# EAGLE board sbc (EAGLE 7.5.0)
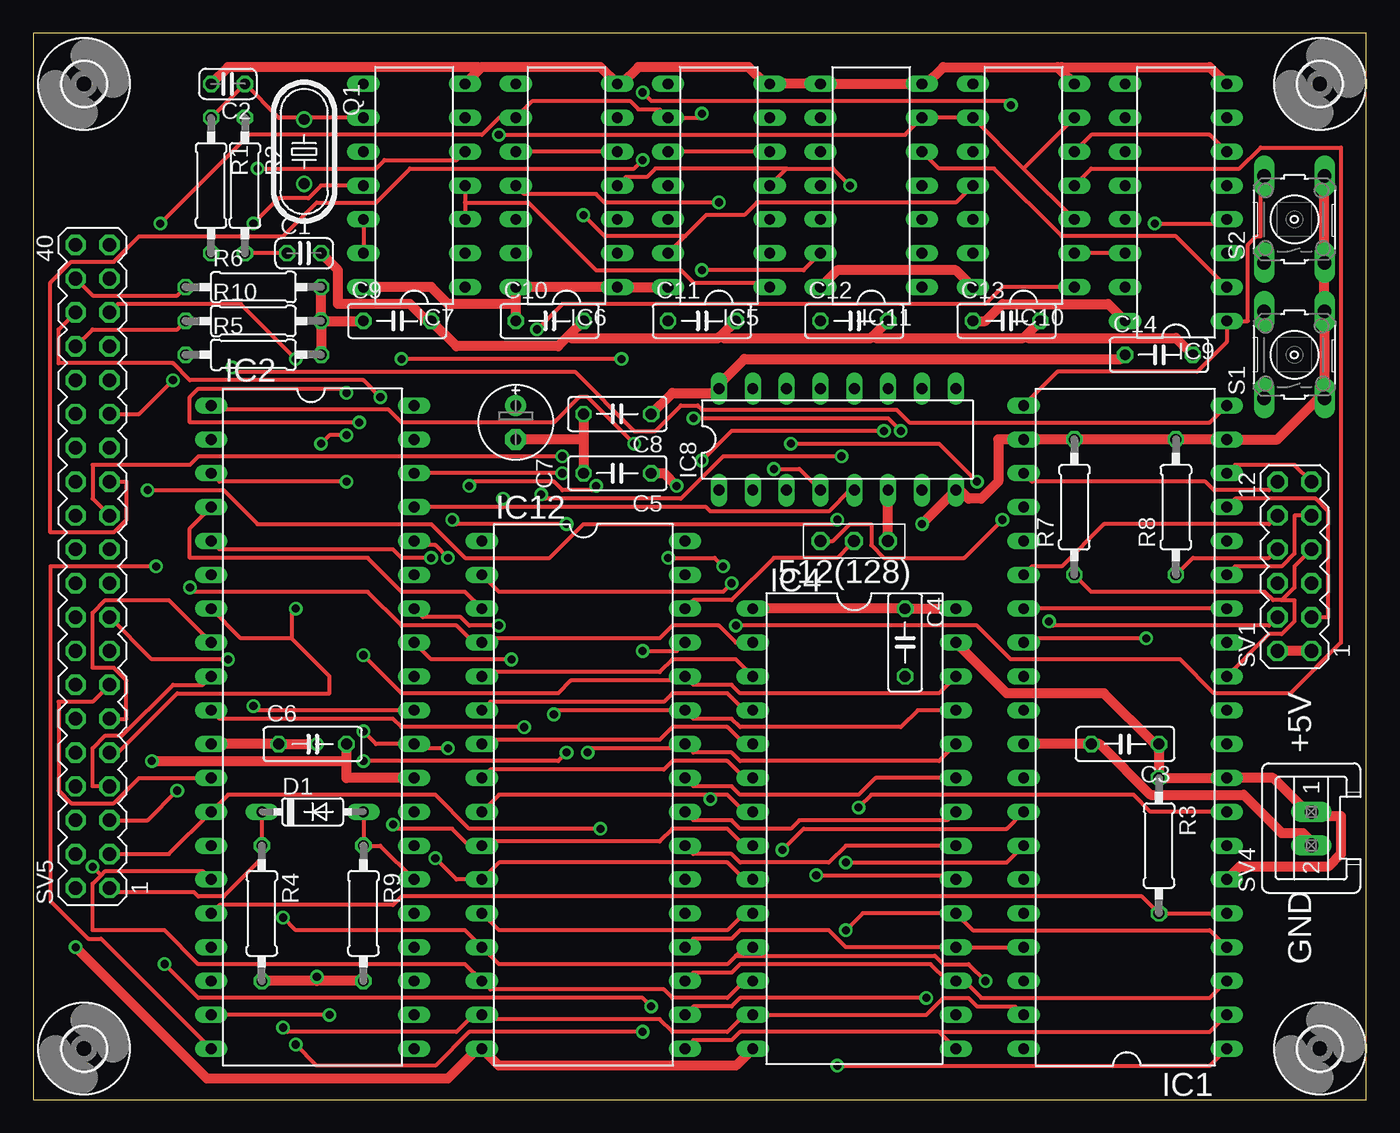
[diagram p0: board, top side]
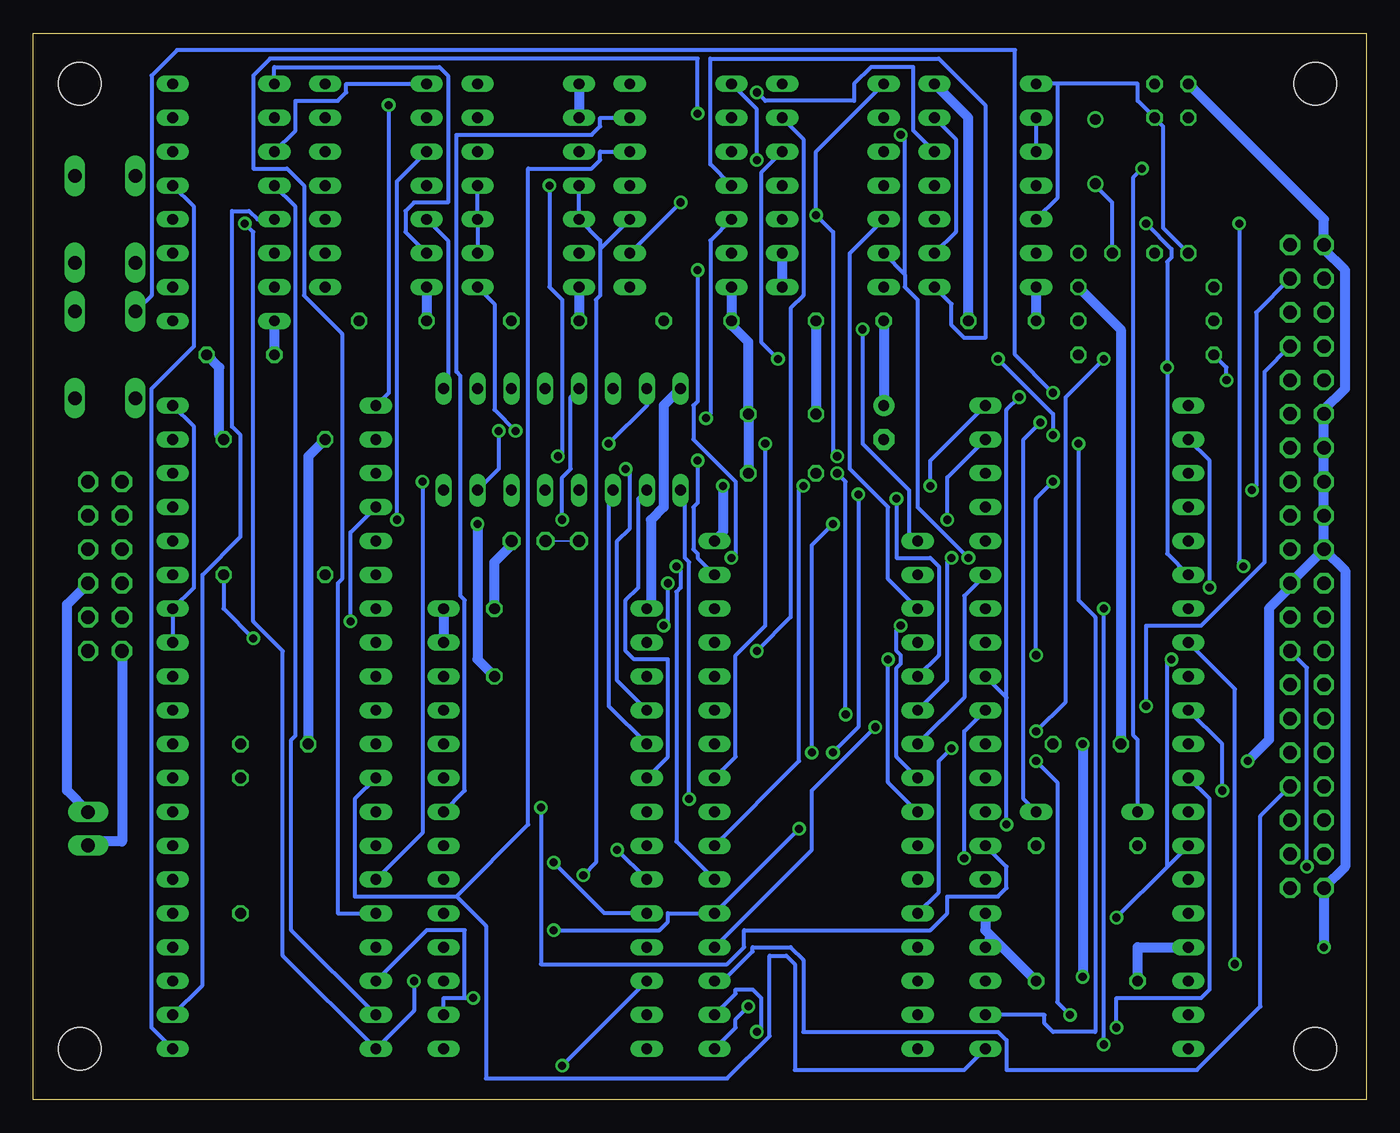
[diagram p1: board, bottom side, seen from below]

Size 100 x 80 mm. Coordinates in mm from the lower left corner, seen from the top.
Outline: 0,0 100,0 100,80 0,80 0,0
Copper layers (1*16): Top 0.035mm / dielectric 1.5mm / Bottom 0.035mm
Design rules "default *": minimum track width 10mil, minimum drill 24mil, track to track 8mil, track to pad 8mil, pad to pad 8mil, via to via 8mil, smd to smd 8mil, copper to edge 40mil, drill to drill 8mil, minimum pad ring 8mil, minimum via ring 8mil, stop-mask expansion 4mil, vias tented up to drill 0mil, thermal gap 10mil
Net classes: 0 default: width 0.305 mm; 1 power: width 0.762 mm

## Footprints (pad centres in the part's own frame; a part is rotated, then mirrored left to right if it is on the bottom)
C025-024X044 = drill 0.813 octagon: 1 -1.27,0; 2 1.27,0
C050-025X075 = drill 0.813 octagon: 1 -2.54,0; 2 2.54,0
E2,5-6E = drill 0.813 pad 1.575: + -1.27,0 | drill 0.813 pad 1.575 octagon: - 1.27,0
DO35-7 = drill 0.813 long: A 3.81,0; C -3.81,0
3,2 = hole 3.2: 0,0
DIL40 = drill 0.813 long: 1 -24.13,-7.62; 2 -21.59,-7.62; 3 -19.05,-7.62; 4 -16.51,-7.62; 5 -13.97,-7.62; 6 -11.43,-7.62; 7 -8.89,-7.62; 8 -6.35,-7.62; 9 -3.81,-7.62; 10 -1.27,-7.62; 11 1.27,-7.62; 12 3.81,-7.62; 13 6.35,-7.62; 14 8.89,-7.62; 15 11.43,-7.62; 16 13.97,-7.62; 17 16.51,-7.62; 18 19.05,-7.62; 19 21.59,-7.62; 20 24.13,-7.62; 21 24.13,7.62; 22 21.59,7.62; 23 19.05,7.62; 24 16.51,7.62; 25 13.97,7.62; 26 11.43,7.62; 27 8.89,7.62; 28 6.35,7.62; 29 3.81,7.62; 30 1.27,7.62; 31 -1.27,7.62; 32 -3.81,7.62; 33 -6.35,7.62; 34 -8.89,7.62; 35 -11.43,7.62; 36 -13.97,7.62; 37 -16.51,7.62; 38 -19.05,7.62; 39 -21.59,7.62; 40 -24.13,7.62
DIL28-6 = drill 0.813 long: 1 -16.51,-7.62; 2 -13.97,-7.62; 3 -11.43,-7.62; 4 -8.89,-7.62; 5 -6.35,-7.62; 6 -3.81,-7.62; 7 -1.27,-7.62; 8 1.27,-7.62; 9 3.81,-7.62; 10 6.35,-7.62; 11 8.89,-7.62; 12 11.43,-7.62; 13 13.97,-7.62; 14 16.51,-7.62; 15 16.51,7.62; 16 13.97,7.62; 17 11.43,7.62; 18 8.89,7.62; 19 6.35,7.62; 20 3.81,7.62; 21 1.27,7.62; 22 -1.27,7.62; 23 -3.81,7.62; 24 -6.35,7.62; 25 -8.89,7.62; 26 -11.43,7.62; 27 -13.97,7.62; 28 -16.51,7.62
DIL14 = drill 0.813 long: 1 -7.62,-3.81; 2 -5.08,-3.81; 3 -2.54,-3.81; 4 0,-3.81; 5 2.54,-3.81; 6 5.08,-3.81; 7 7.62,-3.81; 8 7.62,3.81; 9 5.08,3.81; 10 2.54,3.81; 11 0,3.81; 12 -2.54,3.81; 13 -5.08,3.81; 14 -7.62,3.81
DIL16 = drill 0.813 long: 1 -8.89,-3.81; 2 -6.35,-3.81; 3 -3.81,-3.81; 4 -1.27,-3.81; 5 1.27,-3.81; 6 3.81,-3.81; 7 6.35,-3.81; 8 8.89,-3.81; 9 8.89,3.81; 10 6.35,3.81; 11 3.81,3.81; 12 1.27,3.81; 13 -1.27,3.81; 14 -3.81,3.81; 15 -6.35,3.81; 16 -8.89,3.81
DIL32 = drill 0.813 long: 1 -17.78,-7.62; 2 -15.24,-7.62; 3 -12.7,-7.62; 4 -10.16,-7.62; 5 -7.62,-7.62; 6 -5.08,-7.62; 7 -2.54,-7.62; 8 0,-7.62; 9 2.54,-7.62; 10 5.08,-7.62; 11 7.62,-7.62; 12 10.16,-7.62; 13 12.7,-7.62; 14 15.24,-7.62; 15 17.78,-7.62; 16 20.32,-7.62; 17 20.32,7.62; 18 17.78,7.62; 19 15.24,7.62; 20 12.7,7.62; 21 10.16,7.62; 22 7.62,7.62; 23 5.08,7.62; 24 2.54,7.62; 25 0,7.62; 26 -2.54,7.62; 27 -5.08,7.62; 28 -7.62,7.62; 29 -10.16,7.62; 30 -12.7,7.62; 31 -15.24,7.62; 32 -17.78,7.62
HC49U-V = drill 0.813: 1 -2.413,0; 2 2.413,0
0207/10 = drill 0.813 octagon: 1 -5.08,0; 2 5.08,0
B3F-10XX = drill 1.016 long: 1 -3.251,2.261; 2 3.251,2.261; 3 -3.251,-2.261; 4 3.251,-2.261
MA06-2 = drill 1.016 octagon: 1 -6.35,-1.27; 2 -6.35,1.27; 3 -3.81,-1.27; 4 -3.81,1.27; 5 -1.27,-1.27; 6 -1.27,1.27; 7 1.27,-1.27; 8 1.27,1.27; 9 3.81,-1.27; 10 3.81,1.27; 11 6.35,-1.27; 12 6.35,1.27
S02P = drill 1.016 long: 1 1.25,0; 2 -1.25,0
MA20-2 = drill 1.016 octagon: 1 -24.13,-1.27; 2 -24.13,1.27; 3 -21.59,-1.27; 4 -21.59,1.27; 5 -19.05,-1.27; 6 -19.05,1.27; 7 -16.51,-1.27; 8 -16.51,1.27; 9 -13.97,-1.27; 10 -13.97,1.27; 11 -11.43,-1.27; 12 -11.43,1.27; 13 -8.89,-1.27; 14 -8.89,1.27; 15 -6.35,-1.27; 16 -6.35,1.27; 17 -3.81,-1.27; 18 -3.81,1.27; 19 -1.27,-1.27; 20 -1.27,1.27; 21 1.27,-1.27; 22 1.27,1.27; 23 3.81,-1.27; 24 3.81,1.27; 25 6.35,-1.27; 26 6.35,1.27; 27 8.89,-1.27; 28 8.89,1.27; 29 11.43,-1.27; 30 11.43,1.27; 31 13.97,-1.27; 32 13.97,1.27; 33 16.51,-1.27; 34 16.51,1.27; 35 19.05,-1.27; 36 19.05,1.27; 37 21.59,-1.27; 38 21.59,1.27; 39 24.13,-1.27; 40 24.13,1.27
JUMP2 = drill 0.9 octagon: 1 0,2.54; 2 0,0; 3 0,-2.54

## Placement (x,y rotation side)
C1  22p  [C025-024X044]  20.32,63.5 0 top
C2  22p  [C025-024X044]  14.61,76.2 180 top
C3  100n  [C050-025X075]  81.92,26.67 180 top
C4  100n  [C050-025X075]  65.41,34.29 270 top
C5  100n  [C050-025X075]  43.81,46.99 180 top
C6  100n  [C050-025X075]  20.95,26.67 0 top
C7  .47m  [E2,5-6E]  36.2,50.8 270 top
C8  100n  [C050-025X075]  43.81,51.44 180 top
C9  100n  [C050-025X075]  27.3,58.42 0 top
C10  100n  [C050-025X075]  38.73,58.42 0 top
C11  100n  [C050-025X075]  50.16,58.42 0 top
C12  100n  [C050-025X075]  61.59,58.42 0 top
C13  100n  [C050-025X075]  73.03,58.42 0 top
C14  100n  [C050-025X075]  84.45,55.88 0 top
D1  1N4148  [DO35-7]  20.95,21.59 0 top
H1  3.2  [3,2]  3.81,76.2 0 top
H2  3.2  [3,2]  96.52,76.2 0 top
H3  3.2  [3,2]  3.81,3.81 0 top
H4  3.2  [3,2]  96.52,3.81 0 top
IC1  Z84C4010 SIO/0  [DIL40]  81.92,27.94 90 top
IC2  Z84C0006  [DIL40]  20.95,27.94 270 top
IC4  27C128  [DIL28-6]  61.59,20.32 270 top
IC5  74HCT32  [DIL14]  51.44,68.58 90 top
IC6  74HCT32  [DIL14]  40.01,68.58 90 top
IC7  74HCT00  [DIL14]  28.57,68.58 90 top
IC8  74HCT138  [DIL16]  60.33,49.53 0 top
IC9  74HCT175  [DIL16]  85.72,67.31 90 top
IC10  74HCT02  [DIL14]  74.3,68.58 90 top
IC11  74HCT02  [DIL14]  62.87,68.58 90 top
IC12  AS6C4008 (1008)  [DIL32]  41.27,24.13 270 top
Q1  7.3728 MHz  [HC49U-V]  20.32,71.12 270 top
R1  1M  [0207/10]  13.34,68.58 270 top
R2  1k  [0207/10]  15.88,68.58 270 top
R3  4k7  [0207/10]  84.45,19.05 270 top
R4  4k7  [0207/10]  17.14,13.97 270 top
R5  4k7  [0207/10]  16.51,55.88 0 top
R6  4k7  [0207/10]  16.51,60.96 0 top
R7  10k  [0207/10]  78.11,44.45 90 top
R8  10k  [0207/10]  85.72,44.45 90 top
R9  4k7  [0207/10]  24.77,13.97 270 top
R10  4k7  [0207/10]  16.51,58.42 0 top
S1  WARM  [B3F-10XX]  94.61,55.88 90 top
S2  COLD  [B3F-10XX]  94.61,66.04 90 top
SV1  TTY A/B  [MA06-2]  94.61,40.01 90 top
SV4  IDE Power  [S02P]  95.89,20.32 90 top
SV5  IDE-CF  [MA20-2]  4.45,40.01 90 top
U$1  JMP2  [JUMP2]  61.58,41.91 90 top

## Library data of the parts
C1-C14 R1-R10 = resistor
D1 = diode
H1-H4 = holes
IC1 IC2 = zilog
IC4 = memory-hitachi; OC_FARNELL: unknown; OC_NEWARK: unknown
IC5-IC11 = 74xx-us
IC12 = hitachi_sram_hm628512a-series_rev1
Q1 = crystal; OC_FARNELL: 1666969; OC_NEWARK: unknown
S1 S2 = switch-omron; MPN: B3F-1000; OC_FARNELL: 176432; OC_NEWARK: 36M3542
SV1 SV5 = con-lstb; OC_FARNELL: unknown; OC_NEWARK: unknown
SV4 = con-amp-mt; OC_FARNELL: unknown; OC_NEWARK: unknown
U$1 = jmp1-2

## Nets
A0: IC1.34 IC2.30 IC4.10 IC12.12 SV5.35
A1: IC1.33 IC2.31 IC4.9 IC12.11 SV5.33
A2: IC2.32 IC4.8 IC12.10 SV5.36
A3: IC2.33 IC4.7 IC8.1 IC12.9
A4: IC2.34 IC4.6 IC8.2 IC12.8
A5: IC2.35 IC4.5 IC8.3 IC12.7
A6: IC2.36 IC4.4 IC8.4 IC12.6
A7: IC2.37 IC4.3 IC8.5 IC12.5
A8: IC2.38 IC4.25 IC12.27
A9: IC2.39 IC4.24 IC12.26
A10: IC2.40 IC4.21 IC12.23
A11: IC2.1 IC4.23 IC12.25
A12: IC2.2 IC4.2 IC12.4
A13: IC2.3 IC4.26 IC12.28
A14: IC2.4 IC6.12 IC12.3
A15: IC2.5 IC6.13 IC10.3 IC10.6 IC10.9 IC11.6
CLK: IC1.13 IC1.14 IC1.20 IC1.27 IC2.6 IC7.11
CTA: IC1.18 SV1.11
CTB: IC1.23 SV1.12
D0: IC1.40 IC2.14 IC4.11 IC9.4 IC12.13 SV5.17
D1: IC1.1 IC2.15 IC4.12 IC9.5 IC12.14 SV5.15
D2: IC1.39 IC2.12 IC4.13 IC9.12 IC12.15 SV5.13
D3: IC1.2 IC2.8 IC4.15 IC9.13 IC12.17 SV5.11
D4: IC1.38 IC2.7 IC4.16 IC12.18 SV5.9
D5: IC1.3 IC2.9 IC4.17 IC12.19 SV5.7
D6: IC1.37 IC2.10 IC4.18 IC12.20 SV5.5
D7: IC1.4 IC2.13 IC4.19 IC12.21 SV5.3
GND [power]: C1.2 C2.2 C3.2 C4.2 C5.2 C6.2 C7.- C8.2 C9.2 C10.2 C11.2 C12.2 C13.2 C14.2 IC1.19 IC1.22 IC1.31 IC2.29 IC4.14 IC5.7 IC6.7 IC7.7 IC8.8 IC9.8 IC10.7 IC11.7 IC11.8 IC11.9 IC12.16 R7.2 R8.2 S1.3 S1.4 S2.3 S2.4 SV1.1 SV1.2 SV4.2 SV5.2 SV5.19 SV5.22 SV5.24 SV5.26 SV5.28 SV5.30 SV5.40
INT: IC1.5 IC2.16 R3.2
IORD: IC5.8 SV5.25
IOREQ: IC1.36 IC2.20 IC5.9 IC6.9
IOWR: IC5.13 IC6.8 IC10.11 SV5.23
M1: IC1.8 IC2.27
M15: IC11.1 IC12.31
M16: IC10.4 IC12.2
M17: IC10.10 U$1.1
M18: IC10.1 IC12.1
MEMRD: IC4.22 IC5.6 IC12.24
MEMWR: IC6.6 IC12.29
MREQ: IC2.19 IC5.4 IC6.4
N$1: IC9.6 IC10.5
N$2: IC9.2 IC11.5
N$3: IC7.2 IC7.6
N$4: IC5.11 IC7.1
N$5: C2.1 IC7.9 IC7.10 Q1.1 R1.1
N$6: C1.1 Q1.2 R2.2
N$7: IC5.2 IC6.11
N$8: IC5.1 IC7.3 IC7.4
N$9: IC7.8 IC7.12 IC7.13 R1.2 R2.1
N$10: IC9.11 IC10.8
N$11: IC9.14 IC10.2
N$13: IC11.2 IC11.3 IC11.4
N$16: IC12.30 U$1.2
N$18: IC9.9 IC10.13
N$28: R6.1 SV5.38
N$29: R10.1 SV5.34
N$30: R5.1 SV5.29
RAMS: IC11.13 IC12.22
RD: IC1.32 IC2.21 IC5.5 IC5.10
RESET: D1.C IC1.21 IC7.5 IC9.1 R4.1 S2.2 SV5.1
ROMS: IC4.20 IC5.3 IC11.11 IC11.12
RTA: IC1.17 SV1.3
RTB: IC1.24 SV1.4
RXA: IC1.12 R7.1 SV1.7
RXB: IC1.28 R8.1 SV1.8
TXA: IC1.15 SV1.9
TXB: IC1.26 SV1.10
VCC [power]: C3.1 C4.1 C5.1 C6.1 C7.+ C8.1 C9.1 C10.1 C11.1 C12.1 C13.1 C14.1 IC1.6 IC1.9 IC2.11 IC2.17 IC2.24 IC2.25 IC4.1 IC4.27 IC4.28 IC5.14 IC6.1 IC6.2 IC6.14 IC7.14 IC8.6 IC8.16 IC9.16 IC10.14 IC11.14 IC12.32 R3.1 R4.2 R5.2 R6.2 R9.2 R10.2 SV1.5 SV4.1 U$1.3
WR: IC2.22 IC6.5 IC6.10
WRESET: D1.A IC2.26 R9.1 S1.2
Y0: IC1.35 IC8.15
Y2: IC8.13 SV5.37
Y6: IC8.9 IC10.12
Y7: IC5.12 IC8.7

## Tracks (layer width: path | path; a pad name or v marks a point on that pad's centre or on a via)
A0  (via drill 0.61)
  Top 0.305: IC12.12 34.92,12.7 52.07,12.7 53.34,13.97 IC4.10 | v31.11,26.35 28.89,26.35 IC2.30 25.72,26.67 v24.77,27.62 | IC1.34 73.03,17.78 v60.96,17.78 | SV5.35 6.35,59.69 15.56,59.69 v19.68,55.56
  Bottom 0.305: v31.11,26.35 32.07,25.4 32.07,15.56 IC12.12 | v60.96,17.78 57.15,13.97 IC4.10 | v19.68,55.56 22.54,52.7 22.54,29.84 v24.77,27.62
A1  (via drill 0.61)
  Top 0.305: IC4.9 53.34,16.51 52.07,17.78 34.92,17.78 IC12.11 31.75,16.51 v30.16,18.1 | IC1.33 73.03,20.32 57.78,20.32 v56.2,18.73 | v16.51,29.53 16.83,29.21 IC2.31
  Bottom 0.305: IC2.31 30.16,27.62 v30.16,18.1 | IC4.9 v56.2,18.73 | SV5.33 7.62,54.61 7.62,40.32 12.38,35.56 16.51,35.56 v16.51,29.53
A2  (via drill 0.61)
  Top 0.305: IC4.8 53.34,19.05 52.07,20.32 47.94,20.32 46.99,19.37 33.97,19.37 IC12.10 32.7,19.05 31.43,20.32 27.3,20.32 v26.99,20.64 | SV5.36 1.91,57.78 1.91,55.24 10.48,55.24 11.75,53.98 24.77,53.98 v26.04,52.7
  Bottom 0.305: 26.99,30.16 IC2.32 | v26.99,20.64 26.99,30.16 | v26.04,52.7 26.99,51.75 26.99,30.16
A3  (via drill 0.61)
  Top 0.305: IC12.9 34.92,22.86 50.8,22.86 | 50.8,22.86 52.07,22.86 53.34,21.59 IC4.7 | IC2.33 29.84,33.02 v35.88,33.02 | 50.8,22.86 v50.8,22.54
  Bottom 0.305: v35.88,33.02 35.88,23.81 IC12.9 | IC8.1 51.12,45.4 51.12,40.64 50.8,40.32 v50.8,22.54
A4  (via drill 0.61)
  Top 0.305: IC12.8 34.29,24.77 47.31,24.77 47.94,25.4 52.07,25.4 53.34,24.13 IC4.6 | IC2.34 29.21,36.2 32.07,36.2 32.7,35.56 v34.92,35.56
  Bottom 0.305: v34.92,35.56 35.24,35.24 35.24,33.66 34.92,33.34 34.92,32.7 35.24,32.38 35.24,25.72 IC12.8 | IC8.2 54.61,45.09 54.61,38.42 55.56,37.47 55.56,33.66 54.93,33.02 52.39,33.02 52.39,25.72 IC4.6
A5
  Top 0.305: IC12.7 33.97,26.99 46.99,26.99 47.94,27.94 52.07,27.94 53.34,26.67 IC4.5
  Bottom 0.305: IC12.7 30.16,30.16 30.16,37.78 IC2.35 | IC4.5 56.83,29.53 56.83,45.4 IC8.3
A6  (via drill 0.61)
  Top 0.305: IC12.6 34.29,29.84 47.31,29.84 47.94,30.48 52.07,30.48 53.34,29.21 IC4.4 | IC2.36 28.89,41.59 30.16,41.59 v31.11,40.64 | IC8.4 57.47,47.31 v55.56,47.31
  Bottom 0.305: v31.11,40.64 31.43,40.32 31.43,31.43 IC12.6 | v55.56,47.31 55.24,46.99 55.24,42.86 56.2,41.91 56.2,31.43 IC4.4
A7  (via drill 0.61)
  Top 0.305: IC12.5 33.97,32.07 46.99,32.07 47.94,33.02 52.7,33.02 IC4.3 | 35.24,44.45 50.48,44.45 50.8,44.13 59.69,44.13 61.28,45.72 IC8.5 | 35.24,44.45 IC2.37 | 35.24,44.45 v35.24,45.09
  Bottom 0.305: IC12.5 32.07,33.34 32.07,40.01 32.7,40.64 35.24,40.64 v35.24,45.09
A8  (via drill 0.61)
  Top 0.305: IC4.25 66.36,29.21 65.09,27.94 53.02,27.94 52.39,28.57 49.53,28.57 IC12.27 39.37,29.21 v39.05,28.89 | v39.69,46.99 IC2.38
  Bottom 0.305: v39.69,46.99 39.05,46.35 v39.05,28.89
A9  (via drill 0.61)
  Top 0.305: 49.21,26.35 49.53,26.04 52.39,26.04 53.02,25.4 67.94,25.4 IC4.24 | v31.43,43.5 31.75,43.18 v40.01,43.18 | v41.59,26.04 41.91,26.35 49.21,26.35 | 49.21,26.35 IC12.26
  Bottom 0.305: IC2.39 31.43,46.67 v31.43,43.5 | v40.01,43.18 41.59,41.59 v41.59,26.04
A10  (via drill 0.61)
  Top 0.305: IC12.23 49.53,18.41 52.39,18.41 53.02,17.78 59.69,17.78 60.96,19.05 IC4.21 | v32.7,46.04 33.02,46.35 39.05,46.35 39.69,45.72 41.91,45.72 v42.23,46.04
  Bottom 0.305: IC2.40 32.7,47.94 v32.7,46.04 | v42.23,46.04 42.55,45.72 42.55,25.4 IC12.23
A11  (via drill 0.61)
  Top 0.305: IC12.25 49.53,23.5 52.39,23.5 53.02,22.86 61.91,22.86 63.18,24.13 IC4.23 | IC2.1 13.65,51.75 26.67,51.75 27.62,50.8 39.05,50.8 40.96,52.7 41.59,52.7 v45.09,49.21
  Bottom 0.305: v45.09,49.21 45.09,35.56 47.31,33.34 47.31,25.72 IC12.25
A12  (via drill 0.61)
  Top 0.305: IC4.2 52.7,34.29 51.44,35.56 47.94,35.56 46.99,34.61 33.97,34.61 IC12.4 33.02,34.29 31.75,35.56 27.62,35.56 25.08,38.1 12.06,38.1 v11.75,38.42
  Bottom 0.305: IC2.2 11.75,47.94 v11.75,38.42
A13  (via drill 0.61)
  Top 0.305: 49.21,31.43 49.53,31.11 52.39,31.11 53.02,30.48 67.94,30.48 IC4.26 | IC2.3 13.97,46.35 v23.5,46.35 | v24.77,33.34 27.62,30.48 39.37,30.48 40.32,31.43 49.21,31.43 | 49.21,31.43 IC12.28
  Bottom 0.305: v23.5,46.35 24.77,45.09 v24.77,33.34
A14
  Top 0.305: IC2.4 11.75,42.86 11.75,40.64 25.08,40.64 27.62,38.1 32.38,38.1 IC12.3
  Bottom 0.305: IC6.12 38.73,63.5 38.73,47.31 35.88,44.45 35.88,39.05 IC12.3
A15  (via drill 0.61)
  Top 0.305: 74.3,69.85 IC10.9 IC11.6 65.41,72.39 v34.92,72.39 | 74.3,69.85 IC10.3 | 74.3,69.85 IC10.6 | IC2.5 13.97,41.27 26.99,41.27 27.62,40.64 v29.84,40.64
  Bottom 0.305: v29.84,40.64 33.66,44.45 33.66,60.01 34.61,60.96 34.61,61.91 | IC6.13 34.61,61.91 | v34.92,72.39 34.61,72.07 34.61,61.91
CLK  (via drill 0.61)
  Top 0.305: IC1.14 IC1.27 | v16.51,65.72 18.41,67.63 20.64,67.63 21.59,68.58 IC7.11 | IC1.20 88.27,50.8 65.72,50.8 64.77,51.75 50.16,51.75 49.85,52.07 48.58,52.07 46.67,50.16 45.09,50.16 40.64,54.61 15.24,54.61 v14.92,54.93
  Bottom 0.305: IC1.13 IC1.14 87.95,38.42 87.95,50.48 IC1.20 | IC2.6 14.92,40.96 v14.92,54.93 14.92,62.87 14.61,63.18 14.61,63.82 v16.51,65.72
CTA
  Top 0.305: IC1.18 90.17,47.62 94.61,47.62 SV1.11
CTB
  Top 0.305: IC1.23 74.93,46.35 87.95,46.35 88.58,45.72 92.71,45.72 SV1.12
D0  (via drill 0.61)
  Top 0.305: 52.7,10.79 53.34,11.43 IC4.11 | 52.7,10.79 52.07,10.16 34.92,10.16 IC12.13 32.38,12.7 19.68,12.7 v18.73,13.65 | v71.44,8.89 70.17,10.16 68.26,10.16 67.63,10.79 52.7,10.79 | IC9.4 89.22,65.72 v84.14,65.72 | SV5.17 8.89,33.02 v14.61,33.02
  Bottom 0.305: v18.73,13.65 14.92,17.46 | 14.92,17.46 IC2.14 | v71.44,8.89 71.44,6.67 IC1.40 81.28,10.79 81.28,33.66 83.5,35.88 83.5,65.09 v84.14,65.72 | v14.61,33.02 14.92,32.7 14.92,17.46
D1  (via drill 0.61)
  Top 0.305: IC4.12 53.34,8.89 52.07,7.62 47.94,7.62 47.31,8.26 34.29,8.26 IC12.14 32.38,10.16 12.38,10.16 9.84,12.7 4.45,12.7 4.45,16.19 5.08,16.83 | IC2.15 12.7,17.14 5.4,17.14 5.08,16.83 | IC1.1 88.27,2.54 v60.33,2.54 | 5.08,16.83 v4.45,17.46
  Bottom 0.305: IC4.12 v60.33,2.54 | IC9.5 87.95,66.99 87.95,56.52 91.12,53.34 91.12,5.4 IC1.1 | SV5.15 4.45,32.38 v4.45,17.46
D2  (via drill 0.61)
  Top 0.305: IC2.12 7.94,24.13 6.03,22.23 2.86,22.23 1.91,23.18 1.91,29.84 4.45,29.84 SV5.13 | IC1.39 73.66,6.99 70.8,6.99 70.17,7.62 68.26,7.62 66.99,6.35 IC4.13 53.34,6.35 52.07,5.08 47.94,5.08 46.99,6.03 33.97,6.03 IC12.15 33.02,6.35 31.75,5.08 19.05,5.08 v18.73,5.4
  Bottom 0.305: IC9.12 80.33,66.99 80.33,27.3 80.64,26.99 80.64,12.7 IC1.39 | IC2.12 11.75,22.54 11.75,8.26 12.38,7.62 18.73,7.62 v18.73,5.4
D3  (via drill 0.61)
  Top 0.305: IC2.8 10.16,37.47 5.4,37.47 4.45,36.51 4.45,32.38 6.03,32.38 6.99,31.43 6.99,28.57 SV5.11 | IC12.17 49.53,4.45 52.39,4.45 53.02,5.08 67.94,5.08 | IC4.15 67.94,5.08 | IC1.2 88.27,5.08 67.94,5.08 | v9.84,10.16 12.38,7.62 45.72,7.62 v46.35,6.99
  Bottom 0.305: IC9.13 83.19,66.04 83.82,66.67 85.09,66.67 85.09,50.48 84.45,49.85 84.45,42.23 87.31,39.37 87.31,8.57 IC1.2 | IC2.8 9.84,30.8 v9.84,10.16 | v46.35,6.99 47.31,6.03 47.31,5.4 IC12.17
D4  (via drill 0.61)
  Top 0.305: IC2.7 15.56,34.61 19.37,34.61 | 19.37,34.61 22.23,31.75 22.23,30.48 10.79,30.48 6.35,26.04 SV5.9 | IC12.18 49.53,6.99 52.39,6.99 53.02,7.62 v66.99,7.62 | 19.37,34.61 19.37,36.83 v19.68,36.83 | v19.68,4.13 21.27,2.54 30.16,2.54 32.7,5.08 v45.72,5.08
  Bottom 0.305: 67.63,7.62 69.22,7.62 IC4.16 | 67.63,7.62 v66.99,7.62 | IC1.38 70.48,12.7 67.63,12.7 67.63,7.62 | v19.68,4.13 v19.68,36.83 | v45.72,5.08 45.4,5.4 45.4,7.62 46.04,8.26 47.31,8.26 47.31,7.94 IC12.18
D5
  Top 0.305: IC2.9 12.7,31.11 10.48,31.11 6.67,27.3 5.4,27.3 4.45,26.35 4.45,23.5 SV5.7 | IC12.19 49.53,9.53 52.39,9.53 53.02,10.16 67.31,10.16 68.58,8.89 IC4.17 69.85,8.89 71.12,7.62 88.27,7.62 IC1.3
  Bottom 0.305: SV5.7 7.94,21.27 7.94,6.99 12.7,2.22 26.99,2.22 26.99,4.45 27.62,5.08 42.23,5.08 42.23,10.48 43.18,11.43 46.04,11.43 46.04,11.11 48.26,8.89 IC12.19
D6  (via drill 0.61)
  Top 0.305: v10.79,23.18 8.57,20.95 SV5.5 | IC12.20 49.53,12.06 52.39,12.06 53.02,12.7 59.69,12.7 60.96,11.43 IC4.18 IC1.37 | IC2.10 13.97,28.57 26.99,28.57 27.62,27.94 v36.83,27.94
  Bottom 0.305: IC2.10 10.79,26.67 v10.79,23.18 | v36.83,27.94 41.59,23.18 41.59,18.73 IC12.20
D7  (via drill 0.61)
  Top 0.305: SV5.3 10.16,18.41 IC2.13 14.61,22.86 30.16,22.86 32.7,20.32 v42.55,20.32 | v60.96,12.7 62.23,13.97 IC4.19 70.48,12.7 88.27,12.7 IC1.4
  Bottom 0.305: v60.96,12.7 53.02,12.7 52.39,13.34 52.39,13.97 IC12.21 v42.55,20.32
GND  (via drill 0.61)
  Top 0.762: IC4.14 52.7,2.54 34.92,2.54 IC12.16 33.34,3.81 31.11,1.59 13.02,1.59 v3.17,11.43 | 23.5,25.4 23.5,24.13 IC2.29 | 23.5,25.4 C6.2 | v8.89,25.4 23.5,25.4 | SV1.1 SV1.2 | S2.4 96.84,69.22 96.84,62.87 S2.3 96.84,62.55 96.84,59.37 S1.4 96.84,59.05 96.84,52.7 S1.3 96.52,52.7 93.34,49.53 IC1.19 R8.2 R7.2 IC1.22 72.39,49.53 72.39,46.35 71.12,45.09 70.17,45.09 69.53,45.72 IC8.8 v66.67,43.18 | IC1.31 C3.2 80.01,26.67 83.82,22.86 90.81,22.86 93.66,20 95.25,20 95.89,19.37 SV4.2 | 33.5,77.31 33.66,77.47 42.55,77.47 IC6.7 44.13,76.2 45.4,77.47 53.66,77.47 54.93,76.2 IC5.7 IC11.8 IC11.7 66.99,76.2 68.26,77.47 76.83,77.47 76.99,77.31 | 33.5,77.31 IC7.7 | 76.99,77.31 IC10.7 | IC9.8 88.27,77.47 77.15,77.47 76.99,77.31 | C8.2 41.27,49.53 | 41.27,49.53 C5.2 | 41.27,49.53 C7.- | C10.2 40.16,57.31 | 40.16,57.31 39.37,56.52 31.75,56.52 C9.2 29.53,58.42 28.26,59.69 22.86,59.69 22.86,62.23 C1.2 | 51.59,57.31 51.44,57.15 40.32,57.15 40.16,57.31 | 51.59,57.31 C11.2 | 63.02,57.31 62.87,57.15 51.75,57.15 51.59,57.31 | 63.02,57.31 C12.2 | 74.45,57.31 74.3,57.15 63.18,57.15 63.02,57.31 | 74.45,57.31 C13.2 | C14.2 85.72,57.15 74.61,57.15 74.45,57.31 | C2.2 14.61,77.47 33.34,77.47 33.5,77.31
  Bottom 0.762: C2.2 3.17,66.04 SV5.40 3.17,63.82 1.59,62.23 1.59,53.34 3.17,51.75 SV5.30 SV5.28 SV5.26 SV5.24 SV5.22 | SV5.22 1.59,39.69 1.59,17.46 SV5.2 v3.17,11.43 | SV5.22 3.49,41.27 3.49,40.96 SV5.19 5.71,38.42 7.3,36.83 7.3,26.99 v8.89,25.4 | SV1.2 93.34,19.37 95.89,19.37 SV4.2 | C4.2 66.67,33.02 v66.67,43.18 | C14.2 86.04,54.93 86.04,49.85 R8.2 | C3.2 79.38,48.26 R7.2 | IC11.8 IC11.9 | C10.2 C8.2 | IC7.7 29.84,73.66 C9.2
INT
  Top 0.305: IC2.16 13.97,14.61 26.99,14.61 27.62,15.24 83.19,15.24 R3.2 IC1.5
IORD  (via drill 0.61)
  Top 0.305: v45.72,70.48 45.09,69.85 28.26,69.85 25.72,67.31 21.27,67.31 18.73,64.77 7.94,64.77 6.03,62.87 2.86,62.87 1.27,61.28 1.27,42.55 6.03,42.55 6.99,43.5 6.99,46.35 SV5.25
  Bottom 0.305: IC5.8 45.72,74.3 v45.72,70.48
IOREQ  (via drill 0.61)
  Top 0.305: IC2.20 5.08,12.06 4.13,12.06 1.27,14.92 1.27,40.01 v9.21,40.01 | v9.53,65.72 16.19,72.39 33.66,72.39 34.92,73.66 IC6.9 37.47,74.93 44.77,74.93 45.4,74.3 46.99,74.3 IC5.9 49.85,73.66 v50.16,73.98
  Bottom 0.305: v9.21,40.01 9.53,40.32 v9.53,65.72 | IC1.36 77.15,13.97 77.15,38.73 76.83,39.05 76.83,57.47 79.69,60.33 79.69,68.58 80.96,69.85 83.5,69.85 83.5,76.83 82.23,78.11 50.16,78.11 v50.16,73.98
IOWR  (via drill 0.61)
  Top 0.305: 48.9,64.77 50.48,66.36 53.34,66.36 54.29,67.31 69.22,67.31 IC10.11 | 48.9,64.77 IC5.13 | v41.27,66.36 42.86,64.77 48.9,64.77 | SV5.23 4.45,45.09 4.45,47.62 11.75,47.62 12.38,48.26 v39.69,48.26
  Bottom 0.305: IC6.8 41.27,71.12 v41.27,66.36 40.01,65.09 40.01,48.58 v39.69,48.26
M1  (via drill 0.61)
  Top 0.305: v61.91,21.91 62.87,22.86 82.55,22.86 83.82,21.59 IC1.8
  Bottom 0.305: IC2.27 26.99,17.46 26.99,15.88 27.62,15.24 31.43,15.24 31.43,13.97 32.7,12.7 46.67,12.7 46.67,11.43 47.94,10.16 61.91,10.16 v61.91,21.91
M15  (via drill 0.61)
  Top 0.305: v50.16,47.94 52.39,50.16 v63.82,50.16
  Bottom 0.305: IC12.31 50.16,40.64 50.16,40.96 50.48,41.27 50.48,44.45 50.16,44.77 v50.16,47.94 | v63.82,50.16 65.41,51.75 65.41,59.69 IC11.1
M16  (via drill 0.61)
  Top 0.305: IC12.2 34.92,38.1 51.75,38.1 v52.39,38.73 | v52.7,35.56 70.8,35.56 73.34,33.02 86.04,33.02 88.58,30.48 94.3,30.48 98.11,34.29 98.11,71.44 92.08,71.44 90.49,69.85 79.38,69.85 IC10.4
  Bottom 0.305: v52.39,38.73 52.39,35.88 v52.7,35.56
M17  (via drill 0.61)
  Top 0.305: v72.71,43.5 69.85,40.64 63.82,40.64 62.87,41.59 62.87,43.18 61.28,43.18 60.01,41.91 59.05,41.91 U$1.1
  Bottom 0.305: IC10.10 72.71,68.9 v72.71,43.5
M18  (via drill 0.61)
  Top 0.305: v37.78,57.78 39.69,59.69 71.44,59.69 72.71,60.96 IC10.1
  Bottom 0.305: IC12.1 34.29,42.55 34.29,45.72 37.78,49.21 v37.78,57.78
MEMRD
  Top 0.305: IC12.24 49.53,20.95 52.39,20.95 53.02,20.32 56.83,20.32 57.47,20.95 68.58,20.95 IC4.22
  Bottom 0.305: IC5.6 57.47,73.66 57.47,73.03 58.1,72.39 68.26,72.39 68.26,54.61 67.94,54.29 67.94,37.78 67.63,37.47 67.63,23.18 IC4.22
MEMWR  (via drill 0.61)
  Top 0.305: IC12.29 48.26,33.66 v45.72,33.66
  Bottom 0.305: v45.72,33.66 43.18,36.2 43.18,59.37 42.23,60.33 42.23,72.07 IC6.6
MREQ  (via drill 0.61)
  Top 0.305: v22.23,6.35 IC2.19 | v24.77,25.4 39.37,25.4 v40.01,26.04 | v38.1,45.4 38.42,45.09 48.58,45.09 51.75,48.26 v60.64,48.26 | v61.28,68.58 60.01,69.85 56.52,69.85 | IC5.4 56.52,69.85 | IC6.4 44.45,69.22 46.04,69.22 46.67,69.85 56.52,69.85
  Bottom 0.305: v22.23,6.35 23.18,7.3 23.18,23.81 v24.77,25.4 | v40.01,26.04 38.1,27.94 v38.1,45.4 | v60.64,48.26 60.33,48.58 60.33,60.01 61.28,60.96 v61.28,68.58
N$1
  Top 0.305: IC10.5 79.38,72.39 88.27,72.39 IC9.6
N$2
  Top 0.305: IC11.5 67.94,69.85 72.07,69.85 77.15,64.77 85.72,64.77 IC9.2
N$3
  Bottom 0.305: IC7.2 30.8,65.09 30.8,72.07 IC7.6
N$4
  Bottom 0.305: IC7.1 31.11,59.69 31.11,58.1 30.16,57.15 28.57,57.15 28.57,74.61 32.07,78.11 49.21,78.11 49.21,70.17 IC5.11
N$5
  Top 0.305: R1.1 C2.1 18.41,73.66 20.32,73.66 | IC7.9 20.32,73.66 | 20.32,73.66 Q1.1
  Bottom 0.305: IC7.9 IC7.10
N$6
  Top 0.305: C1.1 R2.2
  Bottom 0.305: C1.1 19.05,67.31 20.32,68.58 Q1.2
N$7  (via drill 0.61)
  Top 0.305: IC6.11 36.83,67.94 42.23,67.94 42.86,67.31 v51.44,67.31
  Bottom 0.305: IC5.2 v51.44,67.31
N$8
  Top 0.305: IC7.4 32.38,67.31 | 32.38,67.31 IC7.3 | IC5.1 54.93,61.28 49.53,61.28 48.58,62.23 42.23,62.23 37.15,67.31 32.38,67.31
N$9
  Top 0.305: IC7.12 IC7.13
  Bottom 0.305: R1.2 15.24,65.41 15.24,73.03 R2.1 17.14,74.93 17.14,76.2 23.18,76.2 | 23.18,76.2 IC7.8 | IC7.12 23.18,67.63 23.18,76.2
N$10
  Bottom 0.305: IC10.8 76.52,76.2 76.52,75.56 77.15,74.93 80.33,74.93 80.33,72.71 IC9.11
N$11
  Top 0.305: IC9.14 IC10.2
N$13
  Bottom 0.305: IC11.2 IC11.3 IC11.4
N$16
  Top 0.305: IC12.30 49.53,37.47 52.39,37.47 55.56,40.64 60.33,40.64 61.28,41.59 U$1.2
N$18
  Bottom 0.305: IC10.13 72.07,65.09 72.07,66.67 71.44,67.31 68.9,67.31 68.9,76.83 69.53,77.47 81.92,77.47 IC9.9
N$28
  Top 0.305: R6.1 10.79,60.33 4.45,60.33 SV5.38
N$29
  Top 0.305: R10.1 10.79,57.78 4.45,57.78 SV5.34
N$30  (via drill 0.61)
  Top 0.305: v10.48,53.98 7.94,51.44 SV5.29
  Bottom 0.305: R5.1 10.48,54.93 v10.48,53.98
RAMS  (via drill 0.61)
  Top 0.305: v51.75,40.01 51.12,40.64 v47.62,40.64 | v50.16,62.23 57.78,62.23 IC11.13
  Bottom 0.305: IC12.22 51.75,19.37 51.75,38.1 51.44,38.42 51.44,39.69 v51.75,40.01 | v47.62,40.64 47.31,40.96 47.31,46.35 50.48,49.53 50.48,52.07 50.16,52.39 v50.16,62.23
RD
  Top 0.305: IC5.5 IC5.10
  Bottom 0.305: IC2.21 30.16,2.22 42.86,2.22 42.86,10.16 43.5,10.79 44.77,10.79 44.77,4.76 47.94,1.59 66.04,1.59 66.04,13.02 68.26,15.24 | 68.26,15.24 75.88,15.24 75.88,22.54 IC1.32 | IC5.5 57.47,71.12 57.47,70.48 58.1,69.85 62.87,69.85 62.87,20.64 68.26,15.24
RESET  (via drill 0.61)
  Top 0.305: IC1.21 76.83,54.61 87.31,54.61 89.53,56.83 IC9.1 91.12,58.42 91.12,64.14 91.76,64.77 92.08,64.77 92.08,69.22 S2.2 | D1.C R4.1 17.14,18.1 14.29,15.24 12.38,15.24 12.06,15.56 6.03,15.56 SV5.1 | IC7.5 31.75,70.48 26.35,70.48 25.72,69.85 v16.83,69.85 | v73.34,74.61 73.03,74.93 46.35,74.93 v45.72,75.56
  Bottom 0.305: v16.83,69.85 17.46,69.22 17.46,27.3 17.14,26.99 D1.C | IC1.21 73.34,53.02 v73.34,74.61 | v45.72,75.56 45.09,74.93 38.42,74.93 38.42,76.2 37.15,77.47 33.97,77.47 33.97,72.71 IC7.5
ROMS  (via drill 0.61)
  Top 0.305: IC4.20 68.9,16.83 v58.74,16.83
  Bottom 0.305: v58.74,16.83 57.78,17.78 57.78,60.01 57.47,60.33 57.47,63.82 | 57.47,63.82 57.47,64.45 IC11.12 IC11.11 | 57.47,63.82 IC5.3
RTA
  Top 0.305: IC1.17 90.17,45.09 96.2,45.09 97.16,44.13 97.16,36.2 SV1.3
RTB  (via drill 0.61)
  Top 0.305: v76.2,35.88 76.52,35.56 92.71,35.56 SV1.4
  Bottom 0.305: IC1.24 76.2,42.55 v76.2,35.88
RXA
  Top 0.305: R7.1 79.38,38.1 92.39,38.1 93.03,37.47 93.66,37.47 | 93.66,37.47 94.61,38.42 94.61,40.01 SV1.7 | IC1.12 92.71,34.92 93.66,34.92 94.61,35.88 94.61,37.47 93.66,37.47
RXB  (via drill 0.61)
  Top 0.305: IC1.28 74.61,34.61 v83.5,34.61 | SV1.8 92.71,40.64 87,40.64 R8.1
  Bottom 0.305: v83.5,34.61 85.72,36.83 R8.1
TXA
  Top 0.305: IC1.15 90.17,40.01 93.66,40.01 94.61,40.96 94.61,43.81 SV1.9
TXB
  Top 0.305: IC1.26 74.93,40.01 77.15,40.01 80.33,43.18 92.71,43.18 SV1.10
VCC  (via drill 0.61)
  Top 0.762: IC8.6 64.14,41.91 U$1.3 | IC4.1 C4.1 IC4.28 | IC1.6 90.49,17.46 97.16,17.46 98.11,18.41 98.11,21.27 95.89,21.27 SV4.1 95.57,21.59 93.03,24.13 IC1.9 R3.1 C3.1 84.14,26.67 80.33,30.48 73.03,30.48 IC4.27 | R9.2 21.27,8.89 | 21.27,8.89 R4.2 | IC2.11 C6.1 v21.27,26.67 | R10.2 R5.2 | R10.2 R6.2 | R10.2 C9.1 | v21.27,9.21 21.27,8.89 | IC11.14 60.33,62.23 69.22,62.23 IC10.14 | IC9.16 80.64,59.69 72.71,59.69 71.44,58.42 C13.1 | 36.2,59.69 IC6.14 IC6.1 IC5.14 | 36.2,59.69 C10.1 | v48.26,46.04 47.31,46.99 C5.1 | C8.1 47.94,53.02 51.12,53.02 IC8.16 51.44,53.66 53.34,55.56 81.6,55.56 C14.1 | IC7.14 29.84,60.96 31.11,59.69 36.2,59.69
  Bottom 0.762: IC4.28 IC4.27 | C4.1 65.41,40.32 64.14,41.59 U$1.3 | SV1.5 97.47,37.15 97.47,23.18 95.89,21.59 SV4.1 | IC2.17 17.14,11.43 R4.2 | 28.1,12.22 28.57,12.7 IC2.25 | 28.1,12.22 R9.2 | IC2.24 28.26,11.75 28.26,12.06 28.1,12.22 | IC7.14 C9.1 | C6.1 18.41,57.78 R6.2 | v21.27,26.67 v21.27,9.21 | IC9.16 C14.1 | IC11.14 C12.1 | IC10.14 C13.1 | C10.1 C7.+ | IC5.14 C11.1 47.62,58.1 46.35,56.83 C8.1 C5.1 | IC6.2 IC6.1 | IC12.32 48.26,42.55 v48.26,46.04 | IC4.1 53.66,37.15 53.66,43.5 52.7,44.45 52.7,52.07 IC8.16
WR  (via drill 0.61)
  Top 0.305: v21.59,49.21 22.23,49.85 v23.5,49.85 | v44.13,55.56 v27.62,55.56 | IC6.5 IC6.10
  Bottom 0.305: IC2.22 24.13,6.35 24.13,5.71 23.5,5.08 20.32,5.08 20.32,36.2 21.59,37.47 v21.59,49.21 | v23.5,49.85 23.5,51.44 v27.62,55.56 | v44.13,55.56 45.4,56.83 45.4,69.53 IC6.5
WRESET  (via drill 0.61)
  Top 0.305: D1.A R9.1 26.04,19.05 IC2.26 | v23.5,53.02 23.18,53.34 12.38,53.34 11.75,52.7 11.75,50.8 v24.45,50.8
  Bottom 0.305: v23.5,53.02 26.35,55.88 26.35,78.74 89.22,78.74 91.12,76.83 91.12,60.33 92.08,59.37 S1.2 | v24.45,50.8 25.72,49.53 25.72,22.54 D1.A
Y0  (via drill 0.61)
  Top 0.305: v70.8,46.35 67.94,49.21 v56.83,49.21
  Bottom 0.305: IC1.35 70.8,20 v70.8,46.35 | v56.83,49.21 53.98,52.07 IC8.15
Y2  (via drill 0.61)
  Top 0.305: v60.33,43.5 60.01,43.18 41.27,43.18 38.73,40.64 32.38,40.64 29.84,43.18 16.83,43.18 14.29,45.72 v8.57,45.72
  Bottom 0.305: IC8.13 59.69,52.7 59.69,47.31 60.33,46.67 v60.33,43.5 | v8.57,45.72 8.26,46.04 8.26,59.05 SV5.37
Y6
  Bottom 0.305: IC8.9 68.9,53.66 68.9,64.45 IC10.12
Y7  (via drill 0.61)
  Top 0.305: v65.09,50.16 64.14,51.12 v49.53,51.12
  Bottom 0.305: IC8.7 65.09,47.31 v65.09,50.16 | v49.53,51.12 49.21,51.44 49.21,64.45 IC5.12

## Text on the board
tPlace: 512(128) | +5V | GND
_tplace: 40 | 6 | 6 | 1 | 1 | 1 | 2 | 1